# Altium PCB WatcherJet.PcbDoc (part 2 of 3)
Units mm, origin at the board's own origin, x right, y up, seen from the top; angles counter-clockwise.
Board outline 160 x 115 mm, 2 copper layers (Top Layer, Bottom Layer); 119 components, 123 nets, 459 pads, 208 vias.
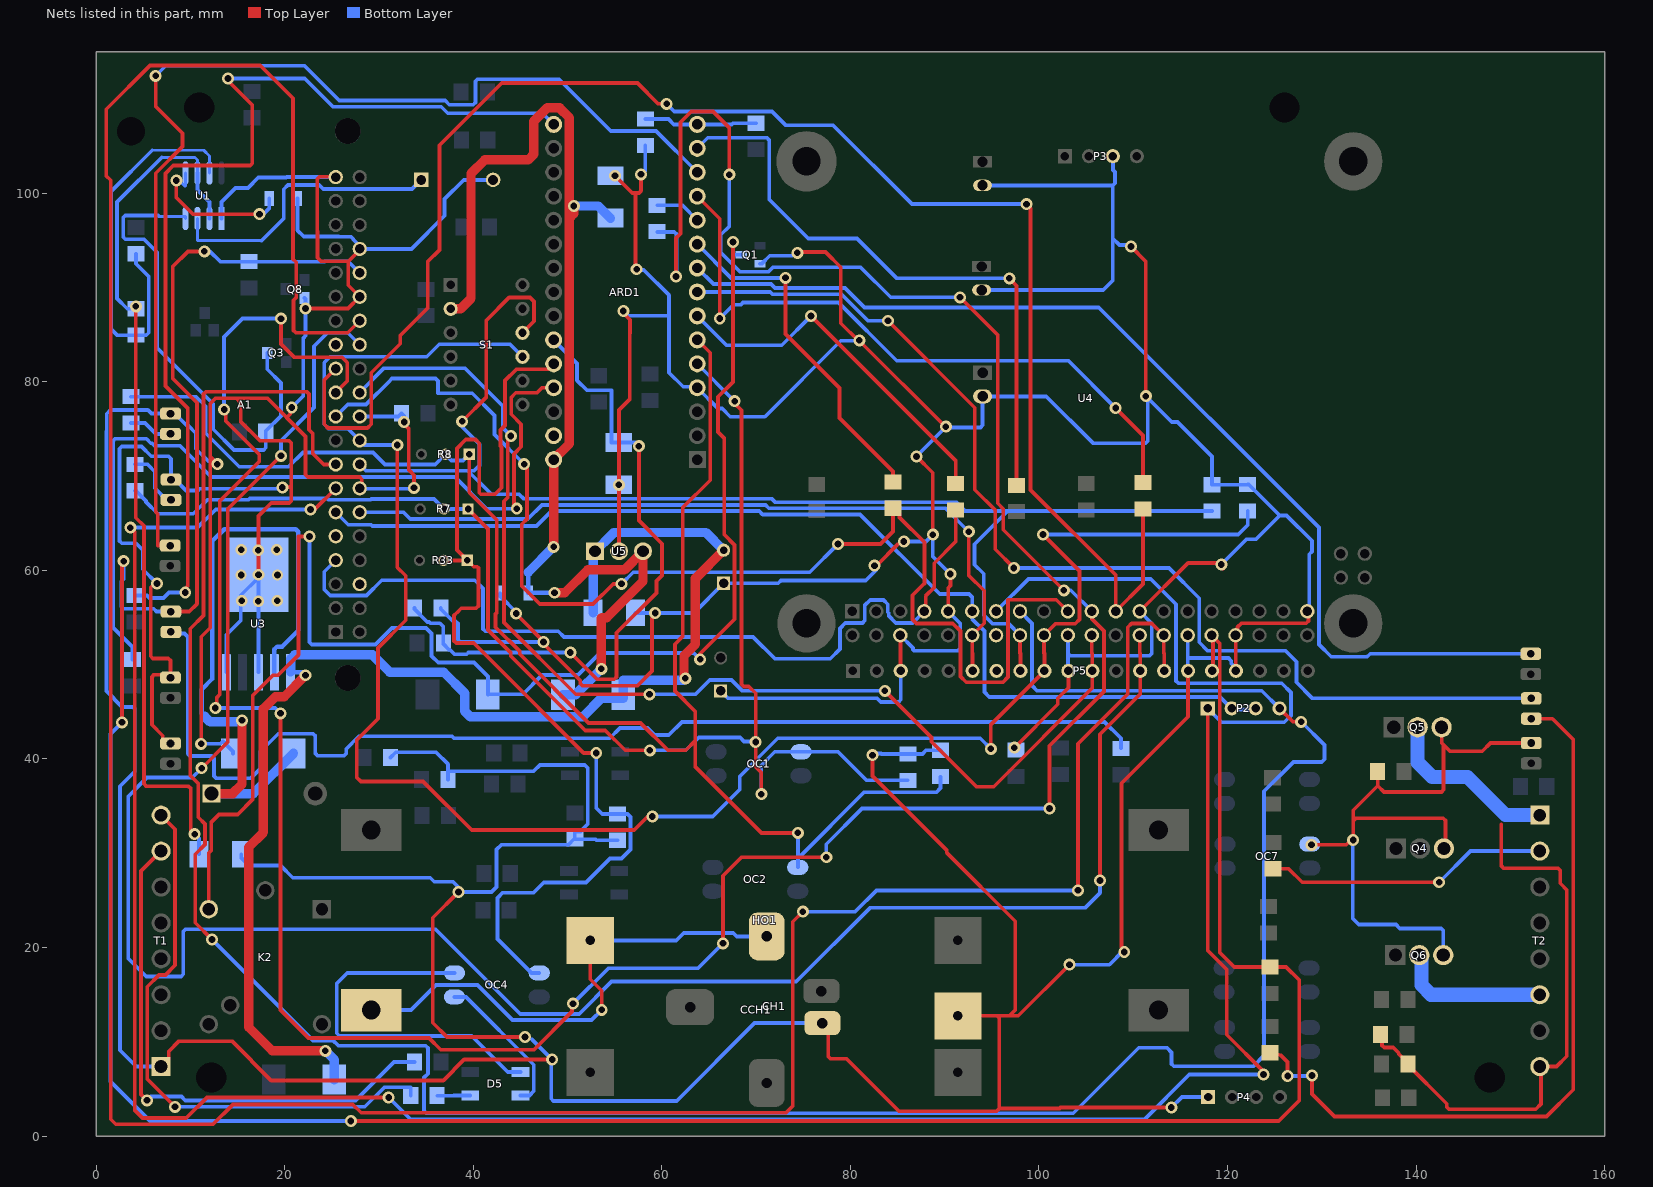
[diagram p2: the nets of this part, all layers, seen from the top]

## Via types
v1: diameter 1.27, hole 0.711, Top Layer to Bottom Layer, 200 vias
v2: diameter 1.2, hole 0.7, Top Layer to Bottom Layer, 8 vias

## Nets (pads, with @x,y where several pads share a name; then routed paths per layer and width w, separated by ;. In a path a pad name is that pad's centre, name@x,y a point inside that pad or via, vN(x,y) a via of type N, cw(c..) or ccw(c..) an arc to the next point about the centre after c; other vN are vias at no path point) (continued)
A6: ARD1.25 C5.2 R10.1 R18.2 | length 71.5
  Top Layer w0.4: v1(50.285,51.299) 53.118,48.466 54.951,48.466 55.185,48.701 55.185,53.381 59.424,57.619 59.424,58.89 60.009,59.476 60.009,62.837 57.556,65.29 v1(57.556,73.177)
  Bottom Layer w0.4: R18.2@33.746,56.009 33.746,55.909 35.112,54.543 35.294,54.543 35.448,54.389 36.445,54.389 36.815,54.019 R10.1@36.815,52.292 36.815,52.192 37.415,51.592 37.515,51.592 37.998,51.11 39.294,51.11 39.483,51.299 v1(50.285,51.299) ; ARD1.25@48.514,84.455 51.003,81.966 51.003,80.162 52.045,79.121 54.655,79.121 54.655,73.583 C5.2@55.437,73.583 57.15,73.583 v1(57.556,73.177)
A7: ARD1.26 C13.2 OC4.3 R33.1 R33.2 | length 114.4
  Top Layer w0.4: R33.2@36.825,61.066 R33.1@39.365,61.066 ; ARD1.26@48.514,81.915 47.93,81.331 44.541,81.331 43.354,80.143 43.354,75.359 42.878,74.883 42.878,73.204 42.993,73.09 42.993,68.777 42.291,68.075 40.792,68.075 40.62,68.247 40.62,73.482 40.214,73.889 39.198,73.889 38.253,72.943 38.253,62.179 R33.1@39.365,61.066 ; v1(53.035,40.64) 51.698,40.64 42.22,50.118 42.22,50.119 40.047,52.292 38.185,52.292 37.951,52.527 37.951,55.233 38.236,55.518 38.248,55.518 38.71,55.981 40.295,55.981 40.529,56.215 40.529,60.272 40.418,60.384 40.048,60.384 R33.1@39.365,61.066
  Bottom Layer w0.4: OC4.3@46.987,17.303 46.152,17.303 42.545,20.909 42.545,25.248 43.104,25.806 46.38,25.806 47.473,26.899 51.943,26.899 54.483,29.439 55.702,29.439 56.667,30.404 56.667,33.858 56.351,34.174 C13.2@55.295,34.174 53.67,34.174 53.035,34.809 v1(53.035,40.64)
Analog_7: R46.2 T1.7 | length 58
  Top Layer w0.4: v1(5.385,3.785) 4.752,4.417 4.752,28.105 T1.7@6.873,30.226
  Bottom Layer w0.4: v1(5.385,3.785) 5.788,4.188 9.042,4.188 9.446,3.785 27.508,3.785 31.565,7.841 R46.2@33.774,7.841
Analog_8: R30.2 T1.8 | length 61.2
  Top Layer w0.4: T1.8@6.873,34.036 8.357,32.552 8.357,18.11 7.341,17.094 6.655,17.094 5.406,15.846 5.406,6.049 v1(8.357,3.099)
  Bottom Layer w0.4: v1(8.357,3.099) 28.472,3.099 30.559,5.186 33.361,5.186 R30.2@33.361,4.278
AR_5V: ARD1.27 R12.2 | length 87.7
  Top Layer w0.4: v1(44.602,66.548) 44.301,66.85 44.301,72.365 45.06,73.123 45.06,75.514 44.008,76.566 44.008,78.359 44.491,78.842 46.736,78.842 47.269,79.375 ARD1.27@48.514,79.375
  Bottom Layer w0.4: R12.2@3.835,50.556 3.835,51.867 1.761,53.941 1.761,73.725 1.995,73.96 5.311,73.96 5.771,73.5 5.91,73.5 6.175,73.235 8.883,73.235 12.203,69.915 38.035,69.915 41.402,66.548 v1(44.602,66.548)
AR_IN_9V: ARD1.30 C1.1 C3.2 D4.2 S1.2 U5.3 | length 123.7
  Top Layer w1: S1.2@37.592,87.746 38.633,87.746 39.75,88.862 39.75,102.106 41.217,103.573 45.834,103.573 46.42,104.159 46.42,107.663 47.821,109.064 49.152,109.064 50.189,108.028 50.189,97.368 ; v1(48.514,62.509) ARD1.30@48.514,71.755 50.189,73.43 50.189,97.368 ; v1(48.616,57.633) 49.701,57.633 52.131,60.062 56.018,60.062 U5.3@57.993,62.037 57.993,58.848 54.146,55.001 53.618,55.001 53.569,54.951 v1(53.569,49.555) ; v1(50.649,98.66) 50.649,97.828 50.189,97.368
  Bottom Layer w0.5: C1.1@45.821,57.587 C1.1@45.821,57.633 ; 45.821,59.816 C1.1@45.821,57.633 ; v1(48.616,57.633) C1.1@45.821,57.633
  Bottom Layer w1: 45.821,59.816 v1(48.514,62.509) ; D4.2@49.506,46.818 49.506,46.83 50.843,46.83 v1(53.569,49.555) ; v1(50.649,98.66) 53.254,98.66 C3.2@54.546,97.368
B: Q6.2 T2.6 | length 16.3
  Bottom Layer w1: Q6.2@140.345,19.195 Q6.2@140.565,18.975
  Bottom Layer w1.5: Q6.2@140.565,18.975 140.565,16.009 141.586,14.989 T2.6@153.126,14.989
Buzzer: R20.1 T2.2 | length 30.3
  Top Layer w0.4: R20.1@124.804,28.353 126.48,28.353 127.92,26.913 127.929,26.922 v1(142.455,26.922)
  Bottom Layer w0.4: v1(142.455,26.922) 145.761,30.229 T2.2@153.126,30.229
D2: ARD1.5 C8.2 OC1.3 R7.1 R7.2 R15.2 | length 155.2
  Top Layer w0.4: R7.1@39.437,66.521 41.554,64.403 41.554,53.682 43.954,51.282 43.954,50.948 51.873,43.03 53.998,43.03 56.108,40.92 v1(58.718,40.92) ; v1(67.716,77.953) 67.716,77.717 68.451,76.982 68.451,47.929 68.686,47.695 69.22,47.695 69.95,46.964 v1(69.95,41.792) 69.95,39.143 70.548,38.545 v1(70.548,36.266)
  Bottom Layer w0.4: R15.2@4.099,68.453 4.199,68.453 5.283,67.369 5.283,67.259 6.528,66.015 10.287,66.015 11.76,67.488 16.129,67.488 16.275,67.635 24.52,67.635 24.666,67.488 29.058,67.488 29.159,67.589 35.828,67.589 R7.2@36.897,66.521 R7.1@39.437,66.521 ; v1(58.718,40.92) 62.536,40.92 63.907,42.292 68.273,42.292 68.276,42.294 68.715,41.855 69.888,41.855 v1(69.95,41.792) ; ARD1.5@63.754,81.915 v1(67.716,77.953) ; v1(70.548,36.266) 70.548,39.331 71.978,40.762 OC1.3@74.75,40.762 78.678,40.762 81.702,37.737 C8.2@86.087,37.737
D3: ARD1.6 C9.2 OC2.3 R8.1 R8.2 R27.2 | length 174.7
  Top Layer w0.4: R8.1@39.566,72.324 39.566,68.282 42.469,65.38 42.469,55.484 42.35,55.365 42.35,53.98 44.931,51.4 44.931,51.108 52.221,43.818 57.742,43.818 60.64,40.92 62.536,40.92 63.525,41.91 ; ARD1.6@63.754,84.455 65.126,83.083 65.126,69.571 62.198,66.643 62.198,52.991 61.386,52.178 61.386,47.199 63.525,45.06 63.525,41.91 ; v1(74.422,32.159) 70.555,32.159 63.525,39.189 63.525,41.91
  Bottom Layer w0.4: R27.2@3.659,78.43 10.592,78.43 11.608,77.414 11.608,74.559 15.172,70.994 20.395,70.994 21.918,72.517 29.349,72.517 30.619,71.247 35.95,71.247 R8.2@37.026,72.324 37.68,71.67 38.912,71.67 R8.1@39.566,72.324 ; OC2.3@74.406,28.508 74.422,28.508 74.422,29.456 ; v1(74.422,32.159) 74.422,29.456 ; C9.2@89.559,38.122 89.559,36.906 89.125,36.472 81.438,36.472 74.422,29.456
D4_AR: ARD1.7 R43.1 | length 38.8
  Top Layer w0.4: v1(75.819,86.995) 91.159,71.655 R43.1@91.159,69.211
  Bottom Layer w0.4: ARD1.7@63.754,86.995 66.864,83.885 72.709,83.885 v1(75.819,86.995)
D4_RASp: A1.7 R43.2 U4.7 | length 93.3
  Top Layer w0.4: U4.7@87.828,55.662 87.977,55.811 87.977,57.273 88.881,58.177 88.881,60.764 91.159,63.042 R43.2@91.159,66.411
  Bottom Layer w0.4: A1.7@25.4,61.087 24.181,59.868 24.181,57.963 24.816,57.328 28.651,57.328 30.279,58.955 40.144,58.955 41.021,58.078 41.021,53.775 41.255,53.541 49.012,53.541 49.622,52.931 69.675,52.931 71.983,50.623 77.851,50.623 78.892,51.664 78.892,53.853 79.458,54.418 81.271,54.418 81.505,54.653 81.505,56.283 82.1,56.878 83.5,56.878 83.964,56.413 83.964,55.558 84.074,55.448 84.074,55.156 84.798,54.432 86.599,54.432 U4.7@87.828,55.662
D5_AR: ARD1.8 BACK_light.2 | length 117.9
  Top Layer w0.4: v1(83.972,86.487) 93.193,77.267 93.193,68.555 95.35,66.397 95.35,62.247 v1(97.336,60.261)
  Bottom Layer w0.4: ARD1.8@63.754,89.535 71.476,89.535 71.719,89.292 79.059,89.292 81.864,86.487 v1(83.972,86.487) ; v1(97.336,60.261) 113.78,60.261 116.992,57.048 116.992,52.375 117.881,51.486 126.144,51.486 127.312,50.317 127.312,48.142 129.023,46.431 BACK_light.2@152.216,46.431
D6_AR: ARD1.9 UP_light.2 | length 112.9
  Bottom Layer w0.4: ARD1.9@63.754,92.075 65.456,90.373 71.582,90.373 72.009,89.946 79.421,89.946 81.48,87.887 106.347,87.887 129.692,64.541 129.692,52.157 131.012,50.838 134.811,50.838 135.133,51.16 UP_light.2@152.178,51.16
D7_AR: ARD1.10 R45.1 | length 37.2
  Top Layer w0.4: v1(73.101,91.035) 73.101,85.09 78.842,79.35 78.842,76.181 84.512,70.51 R45.1@84.512,69.392
  Bottom Layer w0.4: ARD1.10@63.754,94.615 67.334,91.035 v1(73.101,91.035)
D7_RASp: A1.19 R45.2 U4.19 | length 131.1
  Top Layer w0.4: v1(45.39,71.272) 45.691,70.971 45.691,65.459 45.136,64.903 45.136,58.344 47.041,56.439 52.705,56.439 54.84,58.574 v1(55.723,58.574) ; v1(78.689,62.814) 83.192,62.814 84.512,64.135 R45.2@84.512,66.324 ; R45.2@84.512,66.592 R45.2@84.512,66.324 ; U4.19@103.068,55.662 101.834,56.896 96.749,56.896 96.723,56.871 96.723,48.692 96.173,48.142 92.278,48.142 91.669,48.752 91.669,53.569 90.856,54.381 86.995,54.381 86.589,54.788 86.589,57.373 87.838,58.622 87.852,58.622 87.852,62.985 85.212,65.624 85.212,65.992 84.88,66.324 R45.2@84.512,66.324
  Bottom Layer w0.4: A1.19@25.4,76.327 26.67,77.597 28.624,77.597 31.126,80.099 31.126,80.124 31.36,80.358 35.974,80.358 36.246,80.086 36.246,78.791 39.878,78.791 42.24,76.429 42.24,74.422 v1(45.39,71.272) ; v1(55.723,58.574) 56.952,59.803 75.678,59.803 v1(78.689,62.814)
D8_AR: ARD1.11 R5.1 | length 4.9
  Bottom Layer w0.4: R5.1@59.494,98.732 62.177,98.732 ARD1.11@63.754,97.155
D8_RASp: A1.21 R5.2 U4.21 | length 336.2
  Top Layer w0.4: v1(12.623,45.411) 12.789,45.577 12.789,46.527 13.093,46.832 13.093,67.358 17.288,71.553 17.288,72.297 13.726,75.859 13.726,76.895 v1(13.56,77.061) ; v1(19.548,44.843) 19.548,13.37 22.504,10.414 35.288,10.414 36.542,9.16 46.438,9.16 50.474,13.197 50.474,13.949 v1(50.571,14.046) ; v1(19.596,86.713) 19.596,84.011 20.98,82.626 26.035,82.626 26.619,82.042 26.619,80.086 A1.21@25.4,78.867 ; v1(61.488,91.182) 61.488,91.275 61.442,91.321 61.504,91.383 61.504,95.248 61.976,95.72 61.976,107.544 63.119,108.687 65.405,108.687 67.154,106.938 v1(67.154,101.984) ; v1(66.472,20.447) 66.472,27.61 68.436,29.574 v1(77.436,29.574) ; v1(91.618,88.976) 95.617,84.977 95.617,67.122 96.215,66.524 96.215,64.313 v1(102.635,57.893) ; v1(101.117,34.747) 101.117,41.402 106.883,47.168 106.883,53.567 105.608,54.841 U4.21@105.608,55.662
  Bottom Layer w0.4: v1(12.623,45.411) 18.981,45.411 v1(19.548,44.843) ; v1(13.56,77.061) 13.56,84.756 15.517,86.713 v1(19.596,86.713) ; v1(50.571,14.046) 54.323,17.798 63.822,17.798 v1(66.472,20.447) ; R5.2@59.494,95.932 59.511,95.915 61.301,95.915 61.535,95.68 61.535,91.228 v1(61.488,91.182) ; v1(67.154,101.984) 67.154,96.516 66.243,95.606 66.243,93.726 68.28,91.689 71.293,91.689 71.755,92.151 81.102,92.151 84.277,88.976 v1(91.618,88.976) ; v1(77.436,29.574) 77.436,30.958 81.225,34.747 v1(101.117,34.747) ; v1(102.635,57.893) 103.377,57.893 U4.21@105.608,55.662
D9_AR: ARD1.12 R6.1 | length 70.4
  Top Layer w0.4: ARD1.12@63.754,99.695 66.136,97.313 v1(66.136,86.732) ; v1(108.128,77.241) 111.04,74.329 R6.1@111.04,69.332
  Bottom Layer w0.4: v1(66.136,86.732) 67.59,88.186 68.38,88.186 68.609,88.415 78.742,88.415 84.912,82.245 103.124,82.245 v1(108.128,77.241)
D9_RASp: A1.23 R6.2 U4.23 | length 173.8
  Top Layer w0.4: A1.23@25.4,81.407 24.181,80.188 24.181,75.514 24.587,75.108 28.753,75.108 29.159,75.514 29.159,80.96 32.251,84.052 32.251,84.93 35.154,87.833 35.154,92.761 36.398,94.005 36.398,105.105 43.002,111.709 57.404,111.709 59.62,109.493 v1(60.508,109.493) ; v1(98.679,98.857) 99.111,98.425 99.111,68.544 108.148,59.506 U4.23@108.148,55.662 111.04,58.553 R6.2@111.04,66.532
  Bottom Layer w0.4: v1(60.508,109.493) 61.314,108.688 71.678,108.688 73.152,107.213 78.181,107.213 86.538,98.857 v1(98.679,98.857)
D10: ARD1.13 warning.2 | length 119.7
  Top Layer w0.4: v1(6.299,112.471) 6.299,109.218 9.132,106.385 9.132,104.961 6.299,102.128 6.299,66.214 6.528,65.985 6.528,62.641 warning.2@7.822,62.641
  Bottom Layer w0.4: v1(6.299,112.471) 7.366,113.538 22.076,113.538 25.775,109.839 37.008,109.839 37.445,109.401 39.983,109.401 40.234,109.652 40.234,111.887 40.462,112.116 49.061,112.116 54.573,106.604 59.385,106.604 ARD1.13@63.754,102.235
D11: ARD1.14 R42.2 | length 65.7
  Top Layer w0.4: v1(96.85,90.983) 97.625,90.208 R42.2@97.625,69.03
  Bottom Layer w0.4: ARD1.14@63.754,104.775 64.872,105.893 71.145,105.893 71.374,105.664 71.374,99.365 75.514,95.225 80.696,95.225 84.938,90.983 v1(96.85,90.983)
D12_relay: ARD1.15 R3.2 R4.1 | length 12
  Bottom Layer w0.4: R4.1@58.243,107.874 60.706,107.874 61.265,107.315 ARD1.15@63.754,107.315 67.396,107.315 67.515,107.433 R3.2@70.004,107.433
D13: ARD1.16 R11.2 | length 107.5
  Top Layer w0.4: v1(9.436,57.658) 9.602,57.825 9.602,58.239 9.691,58.328 9.691,77.218 7.341,79.568 7.341,102.118 8.172,102.949 16.304,102.949 16.538,103.183 16.538,109.369 13.962,111.945 v1(13.962,112.18)
  Bottom Layer w0.4: R11.2@4.089,57.331 5.387,57.331 5.637,57.081 7.13,57.081 7.708,57.658 v1(9.436,57.658) ; v1(13.962,112.18) 22.119,112.18 25.114,109.185 36.598,109.185 37.284,108.5 47.329,108.5 ARD1.16@48.514,107.315
DE_RE: A1.11 P2.2 P2.3 U4.11 | length 112.7
  Bottom Layer w0.4: A1.11@25.4,66.167 26.721,64.846 29.159,64.846 29.286,64.719 46.711,64.719 48.285,66.294 70.327,66.294 70.685,65.935 81.021,65.935 89.464,57.493 89.66,57.493 89.669,57.502 92.582,57.502 92.908,57.176 U4.11@92.908,55.662 92.908,54.864 94.209,53.564 94.209,47.092 94.717,46.584 119.215,46.584 P2.2@120.435,45.364 120.554,45.245 122.856,45.245 P2.3@122.975,45.364
Ejector: Q5.2 T2.1 | length 19
  Bottom Layer w1.5: Q5.2@140.165,43.369 140.165,39.651 141.72,38.096 145.439,38.096 149.495,34.039 T2.1@153.126,34.039
GND: A1.6 A1.9 A1.14 A1.20 A1.25 A1.30 A1.34 A1.39 ARD1.4 ARD1.29 C1.2 C2.2 C3.1 C4.1 C5.1 C6.N C7.N C8.1 C9.1 C10.1 C11.1 C12.N C13.1 C22.1 CCH1.4 CH1.1 count_a_ok.2 count_b_ng.2 D2.2 link.2 LS1.2 P3.3 P4.1 P5.3 P5.7 P5.10 P5.15 P5.17 power.2 Q1.2 Q8.2 R1.2 R2.2 R4.2 R16.1 R18.1 R28.1 R44.1 R47.1 R51.1 T1.1 U1.1 U3.3 U3.5 U3.6 U4.6 U4.9 U4.14 U4.20 U4.25 U4.30 U4.34 U4.39 U5.2 | length 1157.5
  Top Layer w0.4: v1(6.44,58.605) 6.161,58.605 5.772,58.216 5.772,50.903 6.007,50.668 7.635,50.668 7.869,50.434 link.2@7.869,48.639 7.562,48.946 6.129,48.946 5.895,48.712 5.895,43.621 7.05,42.466 7.05,42.083 7.491,41.643 power.2@7.873,41.643 ; T1.1@6.873,7.366 7.685,8.179 7.685,8.983 8.769,10.067 14.387,10.067 18.548,5.906 36.816,5.906 39.021,8.111 v1(48.355,8.111) ; v1(11.125,41.605) 11.125,52.969 12.08,53.923 12.08,72.096 ; v1(12.837,71.266) 12.837,71.339 12.08,72.096 ; v1(17.199,59.542) 17.199,65.788 18.553,67.143 20.454,67.143 20.688,67.377 20.688,68.846 ; v1(19.729,68.795) 19.78,68.846 20.688,68.846 ; 20.357,76.378 20.568,76.589 20.568,77.125 v1(20.734,77.291) ; v1(22.2,87.78) 26.693,87.78 A1.30@27.94,89.027 26.721,90.246 26.721,92.786 ; A1.39@25.4,101.727 25.372,101.755 23.669,101.755 23.434,101.521 23.434,96.03 23.472,95.992 23.472,93.176 23.862,92.786 26.721,92.786 ; A1.14@27.94,68.707 28.152,68.919 28.152,69.681 27.918,69.915 22.437,69.915 22.203,70.149 22.203,74.212 18.159,78.256 14.838,78.256 ; A1.34@27.94,94.107 27.94,94.005 26.721,92.786 ; v1(32.66,75.743) 32.66,75.508 33.156,75.011 33.156,70.643 33.709,70.09 v1(33.709,68.758) ; v1(38.425,25.894) 35.697,23.165 35.697,12.022 37.212,10.507 v1(45.475,10.507) ; v1(44.546,55.437) 44.546,55.375 47.447,52.475 v1(47.447,52.413) 47.447,52.219 51.33,48.336 51.33,48.008 51.565,47.773 57.396,47.773 58.943,49.32 58.943,54.912 ; v1(55.013,101.868) 56.849,100.032 57.203,100.032 ; U5.2@55.453,62.037 55.445,62.045 55.445,69.075 v1(55.437,69.083) 55.437,77.03 56.599,78.192 56.599,85.155 56.612,85.167 56.612,86.587 55.912,87.287 v1(55.912,87.522) ; v1(57.323,91.948) 57.203,92.069 57.203,100.032 ; v1(57.792,102.016) 57.792,100.266 57.558,100.032 57.203,100.032 ; v1(74.37,93.689) 74.581,93.689 74.674,93.783 77.364,93.783 78.978,92.169 78.978,86.228 80.796,84.41 v1(80.939,84.41) 80.939,84.366 90.048,75.257 v1(90.114,75.257) ; CCH1.4@77.019,11.979 77.639,11.359 77.639,8.437 77.873,8.203 79.585,8.203 85.162,2.626 95.494,2.626 95.796,2.929 ; v1(82.332,40.409) 82.332,38.182 90.227,30.288 90.227,30.041 97.472,22.795 97.472,13.37 96.854,12.752 ; v1(82.549,60.5) 82.76,60.5 85.048,62.788 ; U4.6@85.288,53.122 85.312,53.098 85.312,49.37 P5.3@85.336,49.346 ; v1(87.012,72.088) 88.733,70.366 v1(88.733,63.792) ; U4.9@90.368,55.662 90.368,58.152 90.627,58.411 90.627,59.58 v1(90.596,59.611) ; CH1.1@91.397,12.752 95.562,12.752 ; v1(97.39,41.2) 101.989,45.799 101.989,46.437 103.116,47.564 P5.10@103.116,49.346 ; v1(103.229,18.179) 97.802,12.752 96.854,12.752 ; v1(109.044,19.525) 109.044,19.76 108.762,20.042 108.762,37.419 115.816,44.474 P5.15@115.816,49.346 ; v1(109.761,94.369) 109.761,94.347 111.333,92.776 v1(111.333,78.479) ; U4.25@110.688,55.662 115.823,60.796 119.213,60.796 119.339,60.67 119.339,60.396 v1@119.549,60.187 ; v1(114.037,3.019) 102.285,3.019 102.195,2.929 95.796,2.929 ; P5.17@120.896,49.346 120.872,49.37 120.872,53.098 U4.34@120.848,53.122 121.063,53.337 121.063,53.985 121.47,54.392 128.347,54.392 128.582,54.626 128.582,55.548 U4.39@128.468,55.662 ; 12.08,72.096 12.08,77.692 12.644,78.256 14.838,78.256 ; 14.838,78.256 15.313,77.78 15.313,75.807 17.356,73.763 20.454,73.763 20.688,73.529 20.688,68.846 ; 95.562,12.752 96.854,12.752 ; 95.562,12.752 95.796,12.517 95.796,2.929
  Bottom Layer w0.4: v1(6.44,58.605) 4.921,60.123 4.921,62.158 4.196,62.882 2.709,62.882 2.475,63.117 2.475,72.917 2.709,73.152 4.795,73.152 5.826,72.12 7.652,72.12 7.923,71.849 count_a_ok.2@7.923,69.641 8.373,69.641 9.526,68.489 10.783,68.489 10.97,68.676 19.61,68.676 v1(19.729,68.795) ; T1.1@6.873,7.366 4.242,7.366 2.511,9.097 2.511,37.112 4.089,38.69 4.089,45.291 3.855,45.526 2.741,45.526 1.069,47.198 1.069,74.739 1.113,74.783 1.113,76.613 1.515,77.015 5.47,77.015 5.845,76.64 count_b_ng.2@7.871,76.64 8.321,76.64 9.62,75.342 9.769,75.342 10.551,74.561 10.551,72.912 11.887,71.576 12.527,71.576 v1(12.837,71.266) ; v1(11.125,41.605) 13.187,41.605 13.449,41.867 14.509,40.807 D2.2@14.509,40.586 ; U1.1@13.273,97.331 13.273,99.069 14.781,100.577 16.086,100.577 17.182,101.673 20.138,101.673 20.198,101.733 25.394,101.733 A1.39@25.4,101.727 ; U3.5@13.799,49.192 13.799,53.169 15.331,54.702 15.331,57.362 17.199,59.229 U3.3@17.199,49.192 ; C11.1@15.389,29.901 15.389,29.501 16.189,28.701 19.545,28.701 20.837,27.409 35.425,27.409 35.852,26.983 37.825,26.983 38.425,26.383 v1(38.425,25.894) 38.438,25.881 41.932,25.881 42.466,26.416 42.466,30.392 42.964,30.889 50.061,30.889 R47.1@50.761,31.589 ; v1(20.734,77.291) 21.965,78.522 21.965,84.655 22.2,84.889 v1(22.2,87.78) 22.2,88.79 Q8.2@22.086,88.904 ; C2.2@21.335,99.469 21.335,96.075 21.997,95.413 25.706,95.413 25.717,95.402 27.016,95.402 27.25,95.167 27.25,95.096 27.94,94.407 A1.34@27.94,94.107 33.44,94.107 36.95,97.617 36.95,99.4 38.98,101.43 LS1.2@42.089,101.43 ; A1.14@27.94,68.707 27.982,68.665 33.616,68.665 v1(33.709,68.758) ; A1.20@27.94,76.327 32.035,76.327 R28.1@32.383,76.675 32.66,76.398 v1(32.66,75.743) ; R16.1@31.22,40.157 31.769,40.707 36.051,40.707 37.307,39.451 37.307,38.71 ; R18.1@36.546,56.009 36.546,55.909 37.846,54.609 38.121,54.609 38.355,54.375 38.355,52.648 38.59,52.413 v1(47.447,52.413) ; R44.1@37.307,37.799 37.307,38.71 ; C1.2@42.821,57.587 42.821,57.287 44.546,55.562 v1(44.546,55.437) ; 46.209,10.258 v1(48.355,8.111) 48.252,8.008 48.252,3.948 48.487,3.714 61.568,3.714 69.833,11.979 CCH1.4@77.019,11.979 ; C13.1@55.295,31.374 53.074,31.374 52.959,31.489 R47.1@50.761,31.489 R47.1@50.761,31.589 ; v1(55.912,87.522) 56.408,87.026 60.759,87.026 ; C10.1@57.208,55.491 63.389,55.491 C4.1@66.547,58.649 72.335,58.649 72.616,58.93 81.627,58.93 v1@82.729,60.032 ; v1(57.323,91.948) 57.39,91.881 58.079,91.881 60.759,89.201 60.759,87.026 ; v1@58.243,102.336 R4.2@58.243,105.074 ; C22.1@66.229,47.22 67,46.45 82.818,46.45 83.212,46.057 85.102,46.057 85.336,46.291 P5.3@85.336,49.346 ; Q1.2@70.404,92.543 70.604,92.543 71.44,93.379 73.825,93.379 74.135,93.689 v1(74.37,93.689) ; v1(80.939,84.41) 80.896,84.366 78.974,84.366 70.919,76.311 67.25,76.311 66.395,77.165 65.964,77.165 ARD1.4@63.754,79.375 63.652,79.477 62.254,79.477 60.759,80.972 60.759,87.026 ; v1(82.332,40.409) 82.498,40.575 83.213,40.575 83.239,40.601 83.303,40.537 C8.1@86.087,40.537 87.63,40.537 88.015,40.922 C9.1@89.559,40.922 ; U4.6@85.288,53.122 86.637,51.773 86.637,51.585 86.731,51.491 91.406,51.491 91.64,51.725 91.64,54.374 90.368,55.646 U4.9@90.368,55.662 ; v1(85.665,63.06) 88.001,63.06 v1(88.733,63.792) 88.733,61.473 v1(90.596,59.611) ; v1(87.012,72.088) 87.012,72.121 90.114,75.223 v1(90.114,75.257) 90.201,75.17 93.785,75.17 94.019,75.404 C12.N@94.019,78.463 100.762,78.463 105.723,73.502 111.295,73.502 111.529,73.736 v1@111.529,78.282 ; C6.N@93.911,89.739 106.812,89.739 107.824,90.751 107.824,95.242 ; C7.N@94.008,100.846 107.824,100.846 ; v1(97.39,41.2) 97.56,41.03 R51.1@97.56,40.954 ; U4.20@103.068,53.122 103.068,51.181 ; P5.10@103.116,49.346 103.068,49.394 103.068,51.181 ; v1(103.229,18.179) 107.465,18.179 v1@108.927,19.641 ; P3.3@107.838,103.943 107.838,102.473 108.058,102.253 108.058,101.081 107.824,100.846 ; v1(109.761,94.369) 109.595,94.536 108.53,94.536 107.824,95.242 ; U4.25@110.688,55.662 111.969,54.381 111.969,51.181 111.734,50.947 103.303,50.947 103.068,51.181 ; v1(111.333,78.479) v1@111.529,78.282 ; v1(114.037,3.019) 115.16,4.142 P4.1@117.941,4.142 ; U4.30@115.768,53.122 115.792,53.098 115.792,50.653 ; P5.15@115.816,49.346 115.792,49.37 115.792,50.653 ; v1(119.339,60.632) 122.021,63.314 123.015,63.314 125.531,65.83 ; P5.17@120.896,49.346 120.896,49.644 120.384,50.155 120.384,50.418 120.102,50.701 115.84,50.701 115.792,50.653 ; U4.39@128.468,55.662 128.674,55.867 128.674,61.722 128.952,62.001 128.952,63.141 126.263,65.83 125.531,65.83 ; 37.307,38.71 46.406,38.71 47.066,39.37 51.816,39.37 52.121,39.065 52.121,33.071 51.37,32.32 50.761,32.32 R47.1@50.761,31.589 ; 107.824,95.242 107.824,100.846 ; v1@111.529,78.282 114.079,75.733 114.707,75.733 118.352,72.088 R1.2@118.352,69.09 122.114,69.09 R2.2@122.142,69.119 122.242,69.119 125.531,65.83 ; U3.6@17.189,59.542 17.199,59.552 v1(17.199,59.542) U3.6@17.189,59.542
  other v1: 59.291,55.478
  other v2: 17.2,56.733 15.437,56.796 19.193,56.796 15.355,59.512 19.22,59.512 17.179,62.143 15.383,62.187 19.152,62.2
GND1: OC7.3 power1.2 Q4.3 Q5.3 Q6.3 R52.2 R54.2 R56.2 T2.8 | length 131
  Top Layer w0.4: v1(128.909,30.897) 132.597,30.897 133.095,31.394 v1(133.33,31.394) 133.33,33.419 ; R56.2@135.93,38.689 135.93,37.168 ; R52.2@136.232,10.762 136.385,10.61 136.385,9.615 136.619,9.381 137.584,9.381 138.172,8.794 138.172,8.7 139.135,7.737 R54.2@139.135,7.637 139.135,7.537 143.251,3.421 143.251,3.084 143.485,2.85 152.701,2.85 153.254,3.402 153.254,7.241 T2.8@153.126,7.369 154.886,7.369 155.989,8.472 155.989,26.116 155.298,26.807 155.298,28.176 155.064,28.41 149.282,28.41 149.048,28.644 149.048,33.058 ; Q5.3@142.705,43.369 142.733,43.341 142.733,41.694 142.919,41.508 ; Q4.3@142.956,30.504 143.12,30.669 143.12,33.478 142.886,33.712 133.623,33.712 133.33,33.419 ; power1.2@152.212,41.695 147.905,41.695 147.027,40.817 143.61,40.817 142.919,41.508 ; 133.33,33.419 133.33,34.569 135.93,37.168 ; 135.93,37.168 136.591,36.507 142.685,36.507 142.919,36.741 142.919,41.508
  Bottom Layer w0.4: OC7.3@128.732,30.958 128.848,30.958 v1(128.909,30.897) ; v1(133.33,31.394) 133.275,31.339 133.275,23.077 133.911,22.441 137.862,22.441 138.277,22.027 142.651,22.027 142.885,21.793 Q6.3@142.885,19.195
GPIO5_RXD: A1.15 P2.4 U4.15 | length 289
  Top Layer w0.4: v1(12.268,20.853) 10.49,22.631 10.49,29.885 11.528,30.923 11.528,33.101 10.806,33.823 10.806,37.414 9.97,38.25 9.97,53.809 11.374,55.213 11.374,78.71 11.609,78.944 22.338,78.944 22.572,78.71 22.572,74.922 22.965,74.529 22.965,72.412 24.13,71.247 A1.15@25.4,71.247 ; P2.4@125.515,45.364 126.937,43.942 v1(127.813,43.942)
  Bottom Layer w0.4: v1(12.268,20.853) 22.987,10.135 25.121,10.135 25.686,9.57 34.948,9.57 35.182,9.335 35.182,6.607 34.772,6.197 34.772,2.647 35.006,2.413 103.644,2.413 110.59,9.36 113.569,9.36 114.054,8.874 114.054,7.643 114.288,7.409 122.75,7.409 123.876,8.534 123.876,36.57 126.998,39.692 129.998,39.692 130.277,39.971 130.277,41.478 v1(127.813,43.942) ; U4.15@97.988,55.662 99.263,54.387 99.263,47.777 99.797,47.244 123.635,47.244 P2.4@125.515,45.364
GPIO7: A1.26 P5.13 U4.26 | length 228.6
  Top Layer w0.4: v1(11.177,39.019) 13.95,41.792 13.95,66.529 v1(19.585,72.163) ; v1(106.466,27.112) 106.466,42.618 110.736,46.888 P5.13@110.736,49.346 110.736,51.206 110.688,51.254 U4.26@110.688,53.122
  Bottom Layer w0.4: v1(11.177,39.019) 10.186,38.029 5.382,38.029 3.385,36.032 3.385,18.84 5.292,16.933 8.987,16.933 9.221,17.167 9.221,21.711 9.456,21.946 35.992,21.946 44.98,12.957 51.232,12.957 54.664,16.389 74.25,16.389 82.067,24.206 104.873,24.206 106.466,25.799 v1(106.466,27.112) ; v1(19.585,72.163) 19.585,73.763 23.094,77.272 23.094,83.775 24.536,85.217 26.67,85.217 A1.26@27.94,83.947
GPIO12_Buzzer: A1.32 Buzzer1.2 P5.16 R32.1 R55.2 U4.32 | length 316.4
  Top Layer w0.4: v1(2.721,43.883) 2.721,60.804 v1(2.9,60.984) ; Buzzer1.2@7.92,55.638 9.867,55.638 10.684,56.455 10.684,77.783 8.106,80.362 8.106,92.231 9.719,93.844 v1(11.454,93.844) ; v1(27,1.6) 125.425,1.6 127.619,3.794 127.619,16.537 126.213,17.943 R32.1@124.495,17.943 120.715,17.943 119.177,19.482 119.177,52.253 U4.32@118.461,52.97 ; U4.32@118.308,53.122 U4.32@118.461,52.97 ; P5.16@118.356,49.346 118.461,49.451 U4.32@118.461,52.97
  Bottom Layer w0.4: v1(2.721,43.883) 1.498,42.66 1.498,5.792 5.69,1.6 v1(27,1.6) ; v1(2.9,60.984) 2.9,59.09 2.665,58.854 2.665,56.165 2.899,55.931 6.096,55.931 6.389,55.638 Buzzer1.2@7.92,55.638 ; v1(11.454,93.844) 12.053,93.844 13.142,92.755 R55.2@16.199,92.755 24.201,92.755 24.232,92.786 26.721,92.786 A1.32@27.94,91.567
GPIO12_TXD: A1.13 P2.1 U4.13 | length 305.4
  Top Layer w0.4: v1(3.607,64.541) 4.089,64.059 4.089,2.718 4.902,1.905 9.55,1.905 11.735,4.089 v1(31.013,4.089) ; v1(22.727,66.46) 23.153,66.46 A1.13@25.4,68.707 ; P2.1@117.895,45.364 117.895,19.697 119.913,17.678 119.913,10.744 123.825,6.833 v1(123.825,6.523)
  Bottom Layer w0.4: v1(3.607,64.541) 10.744,64.541 12.663,66.46 v1(22.727,66.46) ; v1(31.013,4.089) 33.35,1.753 111.176,1.753 115.946,6.523 v1(123.825,6.523) ; U4.13@95.448,55.662 98.879,59.092 111.85,59.092 114.529,56.413 114.529,48.285 114.783,48.031 125.755,48.031 126.721,47.066 126.721,44.602 126.009,43.891 119.368,43.891 P2.1@117.895,45.364
GPIO18: A1.12 P5.6 U4.12 | length 82.7
  Top Layer w0.4: v1(92.558,64.11) 92.558,59.461 94.183,57.836 94.183,54.396 U4.12@92.908,53.122 92.908,51.254 92.956,51.206 P5.6@92.956,49.346
  Bottom Layer w0.4: A1.12@27.94,66.167 32.588,66.167 33.299,65.456 45.771,65.456 47.269,66.954 70.974,66.954 71.339,66.589 90.078,66.589 v1(92.558,64.11)
GPIO23: A1.16 P5.8 R1.1 S1.10 U4.16 | length 142.6
  Top Layer w0.4: v1(38.811,75.819) 41.377,78.384 41.377,86.533 43.794,88.951 45.999,88.951 46.431,88.519 46.431,86.425 S1.10@45.212,85.206 ; U4.16@97.988,53.122 97.988,51.254 98.036,51.206 P5.8@98.036,49.346
  Bottom Layer w0.4: A1.16@27.94,71.247 28.618,70.569 39.413,70.569 ; v1(38.811,75.819) 38.811,75.209 40.64,73.381 40.64,71.145 40.064,70.569 39.413,70.569 ; U4.16@97.988,53.122 96.754,54.356 95.034,54.356 94.132,55.258 94.132,59.644 93.17,60.606 93.17,62.784 96.677,66.29 ; R1.1@118.352,66.29 96.677,66.29 ; 39.413,70.569 41.907,68.075 44.853,68.075 45.314,67.615 71.622,67.615 71.993,67.243 91.202,67.243 92.155,66.29 96.677,66.29
GPIO24: A1.18 P5.9 R2.1 S1.9 U4.18 | length 203.4
  Top Layer w0.4: v1(31.932,73.314) 31.932,60.327 32.833,59.426 32.833,54.721 29.896,51.784 29.896,44.269 27.638,42.012 27.638,38.046 28.067,37.617 34.671,37.617 39.827,32.461 57.074,32.461 58.507,33.895 v1(58.986,33.895) ; v1(94.894,41.072) 94.894,43.664 P5.9@100.576,49.346 100.576,51.206 100.528,51.254 U4.18@100.528,53.122 101.744,54.338 103.842,54.338 104.292,54.788 104.292,59.944 v1(100.432,63.805)
  Bottom Layer w0.4: v1(31.932,73.314) 28.413,73.314 A1.18@27.94,73.787 26.67,75.057 24.638,75.057 24.181,75.514 24.181,82.042 24.816,82.677 35.063,82.677 36.388,84.002 43.876,84.002 S1.9@45.212,82.666 ; v1(58.986,33.895) 65.391,33.895 68.253,36.757 68.253,38.149 72.293,42.189 93.777,42.189 v1(94.894,41.072) ; v1(100.432,63.805) 121.133,63.805 122.142,64.815 R2.1@122.142,66.319
GPIO25: A1.22 P5.11 U4.22 | length 122.6
  Top Layer w0.4: v1(43.967,74.27) 43.647,73.949 43.647,67.748 43.246,67.348 43.246,54.484 50.868,46.863 v1(58.674,46.863) ; v1(83.653,47.225) 88.589,42.29 88.589,41.827 93.357,37.059 95.198,37.059 105.656,47.516 P5.11@105.656,49.346 105.656,51.206 105.608,51.254 U4.22@105.608,53.122
  Bottom Layer w0.4: A1.22@27.94,78.867 30.531,81.458 39.091,81.458 43.129,77.419 43.129,75.108 v1(43.967,74.27) ; v1(58.674,46.863) 63.551,46.863 65.075,48.387 67.386,48.387 68.548,47.225 v1(83.653,47.225)
ID_SC: A1.28 P5.14 U4.28 | length 326.7
  Top Layer w0.4: A1.28@27.94,86.487 26.67,85.217 21.168,85.217 20.933,85.451 20.933,88.661 21.211,88.938 21.211,92.683 20.879,93.015 20.879,110.084 17.399,113.563 5.709,113.563 1.065,108.92 1.065,101.854 1.534,101.385 1.534,72.294 1.524,72.284 1.524,1.778 2.057,1.245 12.395,1.245 14.502,3.351 27.211,3.351 28.098,2.464 73.177,2.464 73.889,3.175 73.889,22.733 v1(74.955,23.8) ; v1(104.14,26.06) 104.14,41.605 109.423,46.888 109.423,53.975 109.83,54.381 111.969,54.381 U4.28@113.228,53.122 113.228,51.254 113.276,51.206 P5.14@113.276,49.346
  Bottom Layer w0.4: v1(74.955,23.8) 80.493,23.8 82.753,26.06 v1(104.14,26.06)
K2_in: D3.2 K2.A2 Q1.3 | length 156.5
  Top Layer w0.4: K2.A2@11.931,24.066 11.931,30.018 12.182,30.269 12.182,33.255 13.03,34.103 15.002,34.103 16.586,35.687 16.586,46.713 18.759,48.886 19.28,48.886 21.439,51.045 21.439,63.592 v1(22.624,63.592) ; v1(64.052,50.567) 64.052,51.164 67.701,54.813 67.701,62.703 66.624,63.779 66.624,73.995 65.949,74.67 65.949,78.42 67.528,79.999 67.528,94.833 v1(67.539,94.844)
  Bottom Layer w0.4: v1(22.624,63.592) 22.624,52.375 22.858,52.141 29.611,52.141 31.369,53.899 34.976,53.899 35.56,53.315 35.56,50.927 36.265,50.222 40.082,50.222 41.544,48.759 D3.2@41.544,46.863 ; D3.2@41.544,46.845 D3.2@41.544,46.863 ; v1(64.052,50.567) 64.043,50.567 63.383,51.228 53.437,51.228 51.105,48.895 47.295,48.895 45.263,46.863 D3.2@41.544,46.863 ; v1(67.539,94.844) 67.539,93.493 Q1.3@68.404,93.493
LM555_3: LS1.1 U1.3 | length 30.9
  Bottom Layer w0.311: U1.3@10.733,97.331 10.733,95.021 17.533,94.976
  Bottom Layer w0.4: 17.533,94.976 19.888,97.331 19.888,100.432 20.345,100.889 23.647,100.889 24.079,100.457 33.496,100.457 LS1.1@34.469,101.43
LM555_4: Q3.3 R35.1 U1.4 | length 52.4
  Bottom Layer w0.311: 6.666,97.561 9.463,97.561 U1.4@9.463,97.331
  Bottom Layer w0.4: 6.666,97.561 6.579,97.648 3.073,97.648 2.857,97.432 2.857,95.357 3.073,95.14 5.063,95.14 6.461,93.742 6.461,83.611 12.405,77.667 12.405,74.981 14.6,72.786 17.739,72.786 17.973,73.021 17.973,74.778 19.589,76.393 19.589,79.888 18.139,81.338 Q3.3@18.139,83.072
LM555_5: C2.1 U1.5 | length 16.3
  Top Layer w0.4: v1(8.484,101.37) 8.484,99.567 10.262,97.79 v1(17.323,97.79)
  Bottom Layer w0.311: v1(8.484,101.37) 8.741,101.37 9.343,100.768 9.463,100.768 U1.5@9.463,102.158
  Bottom Layer w0.4: v1(17.323,97.79) 17.729,97.79 18.335,98.396 C2.1@18.335,99.469
LM555_6_2: C11.2 R21.1 U1.2 U1.6 | length 93.8
  Top Layer w0.4: v1(4.191,88.01) 4.191,65.592 5.048,64.734 5.048,37.37 5.323,37.095 9.795,37.095 10.03,36.861 10.03,32.439 v1(10.439,32.029)
  Bottom Layer w0.311: 6.935,103.816 10.456,103.816 10.723,103.55 10.723,102.167 U1.6@10.733,102.158
  Bottom Layer w0.4: v1(4.191,88.01) R21.1@4.191,87.76 3.277,87.76 2.203,88.834 2.203,99.084 6.935,103.816 ; v1(10.439,32.029) 10.889,31.58 C11.2@10.889,29.901 ; U1.6@10.733,102.158 10.733,100.355 12.003,99.085 U1.2@12.003,97.331
LM555_7: R17.1 R21.2 U1.7 | length 42.2
  Bottom Layer w0.311: 5.933,104.572 11.405,104.572 12.003,103.974 U1.7@12.003,102.158
  Bottom Layer w0.4: R17.1@4.211,93.594 4.211,92.537 5.563,91.186 5.563,85.214 5.309,84.96 R21.2@4.191,84.96 2.21,84.96 1.549,85.621 1.549,100.188 5.933,104.572
NetBACK_light_1: BACK_light.1 R31.2 | length 80.7
  Top Layer w0.4: R31.2@124.496,8.836 125.679,8.556 126.374,7.862 v1(126.374,6.36) ; v1(128.953,6.431) 128.953,4.473 131.354,2.072 153.837,2.072 156.676,4.911 156.676,42.053 154.457,44.272 BACK_light.1@152.216,44.272
  Bottom Layer w0.4: v1(126.374,6.36) 128.882,6.36 v1(128.953,6.431)
NetBuzzer1_1: Buzzer1.1 R19.2 | length 125
  Bottom Layer w0.4: Buzzer1.1@7.92,53.479 8.099,53.3 9.349,53.3 9.712,52.937 9.712,40.542 9.946,40.308 12.241,40.308 12.475,40.074 12.475,38.2 12.709,37.966 16.423,37.966 17.429,38.973 17.429,40.815 19.3,42.685 23.004,42.685 23.238,42.451 23.238,40.573 23.473,40.339 26.272,40.339 26.516,40.583 26.516,41.072 27.85,42.406 37.728,42.406 37.932,42.202 54.475,42.202 55.551,43.278 58.493,43.278 59.233,42.539 60.723,42.539 62.117,43.932 106.959,43.932 108.702,42.189 R19.2@108.702,41.128
NetC4_2: C4.2 C10.2 D1.1 D4.1 U3.1 U5.1 | length 142.1
  Top Layer w1: v1(22.2,48.881) 19.929,46.61 19.009,46.61 17.729,45.329 17.729,32.207 16.18,30.658 16.18,11.532 18.669,9.042 v1(24.299,9.042) ; v1(62.484,48.555) 62.34,48.7 62.34,50.952 63.551,52.164 63.551,59.153 C4.2@66.547,62.149
  Bottom Layer w0.475: U3.1@20.599,49.251 U3.1@20.599,49.192 21.888,49.192 v1(22.2,48.881)
  Bottom Layer w1: U3.1@20.599,49.251 20.624,49.276 20.624,50.617 21.043,51.037 29.303,51.037 31.14,49.2 36.855,49.2 39.072,46.984 39.072,45.076 39.657,44.491 47.915,44.491 47.941,44.464 51.601,44.464 53.594,46.457 55.916,46.457 D4.1@55.916,46.818 55.916,48.336 62.265,48.336 v1(62.484,48.555) ; v1(24.299,9.042) 25.237,8.104 D1.1@25.237,5.988 ; C10.2@52.708,55.491 52.708,61.833 54.903,64.027 64.668,64.027 C4.2@66.547,62.149
NetCCH1_2: CCH1.2 CH1.4 HO1.2 | length 54.6
  Top Layer w0.4: CH1.4@52.397,20.752 52.397,16.635 53.619,15.413 v1(53.619,13.386)
  Bottom Layer w0.4: HO1.2@29.164,13.366 33.381,13.366 36.043,16.027 40.437,16.027 44.161,12.303 52.537,12.303 v1(53.619,13.386) ; CH1.4@52.397,20.752 61.519,20.752 62.318,21.551 67.562,21.551 67.934,21.179 CCH1.2@71.119,21.179
Netcount_a_ok_1: count_a_ok.1 R15.1 | length 6.4
  Bottom Layer w0.4: R15.1@4.099,71.253 5.419,71.253 5.555,71.117 6.2,70.472 6.2,68.731 7.449,67.482 count_a_ok.1@7.923,67.482
Netcount_b_ng_1: count_b_ng.1 R27.1 | length 4.7
  Bottom Layer w0.4: R27.1@3.659,75.63 5.182,75.63 6.33,74.481 count_b_ng.1@7.871,74.481
NetD2_1: D2.1 L1.1 U3.2 | length 70.4
  Top Layer w1: L1.1@12.226,36.323 14.464,36.323 15.454,37.313 v1(15.454,44.096)
  Bottom Layer w0.475: 11.488,44.512 11.209,44.79 11.209,47.411 12.282,48.483 12.282,63.081 13.585,64.384 21.146,64.384 21.439,64.091 21.439,53.633 19.73,51.924 19.177,51.924 18.899,51.646 U3.2@18.899,49.192
  Bottom Layer w1: 11.488,44.512 12.069,43.93 15.215,43.93 15.381,44.096 v1(15.454,44.096) ; L1.1@12.226,36.323 16.655,36.323 D2.1@20.919,40.586
NetD5_1: D5.1 OC4.1 | length 15.8
  Bottom Layer w0.4: OC4.1@37.987,14.763 39.215,14.763 46.406,7.572 46.406,4.765 45.949,4.307 D5.1@45.003,4.307
NetD5_2: D5.2 R30.1 | length 3.5
  Bottom Layer w0.4: R30.1@36.161,4.278 37.897,4.278 37.926,4.307 D5.2@39.678,4.307
NetD5_3: D5.3 OC4.2 | length 39.4
  Bottom Layer w0.4: OC4.2@37.987,17.303 26.624,17.303 25.502,16.18 25.502,10.897 25.781,10.617 39.828,10.617 43.637,6.808 D5.3@45.003,6.808